# Altium PCB double_sece.PcbDoc
Units mm, origin at the board's own origin, x right, y up, seen from the top; angles counter-clockwise.
Board outline 50.38 x 50.25 mm, 2 copper layers (Top Layer, Bottom Layer); 16 components, 13 nets, 44 pads, 0 vias.
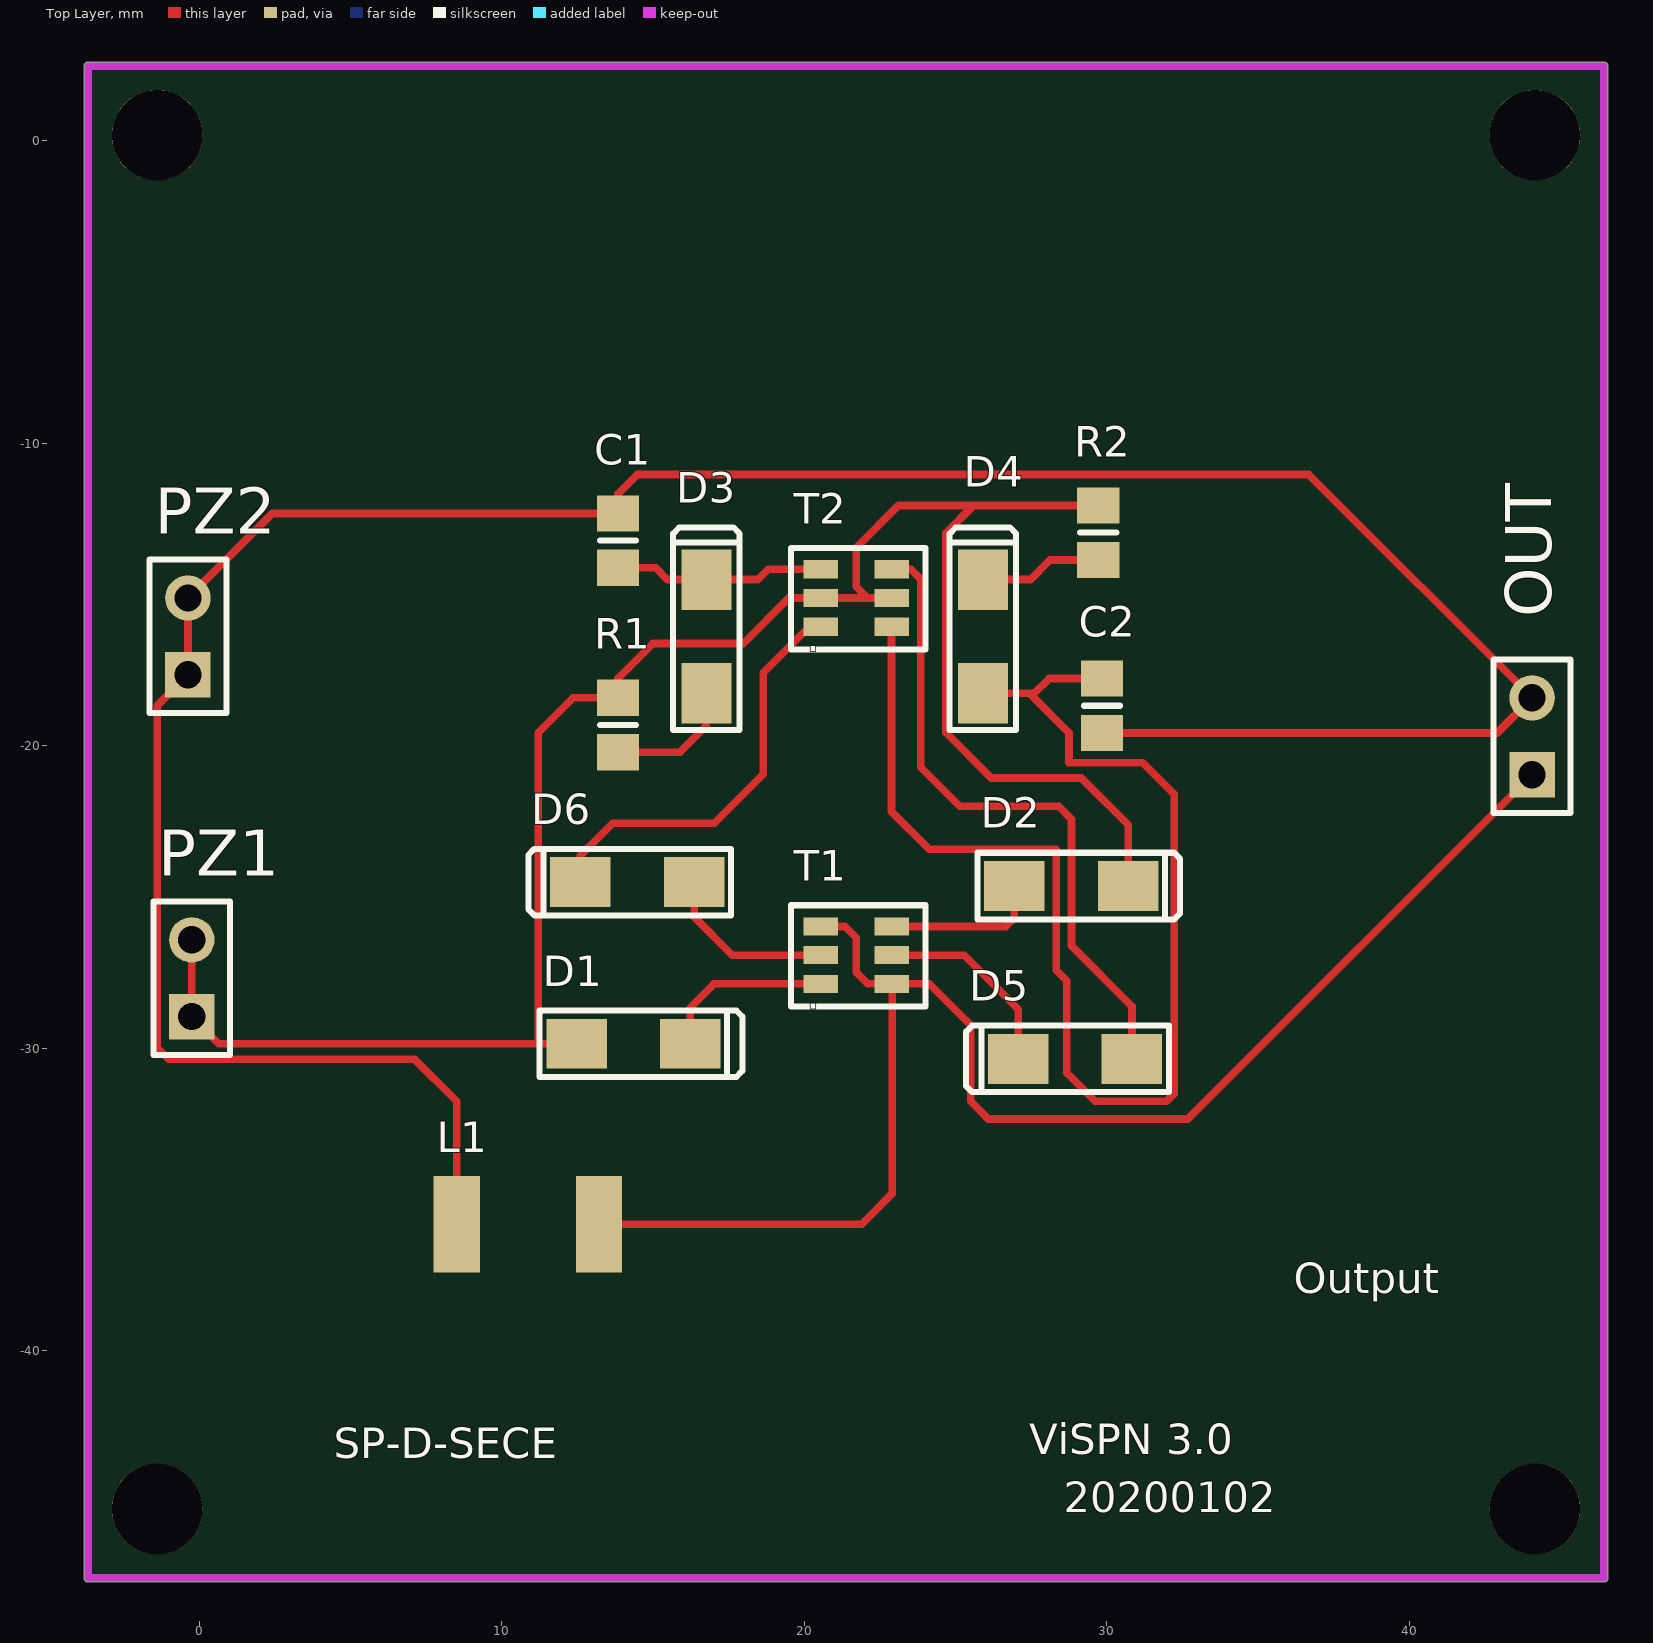
[diagram p0: Top Layer view]
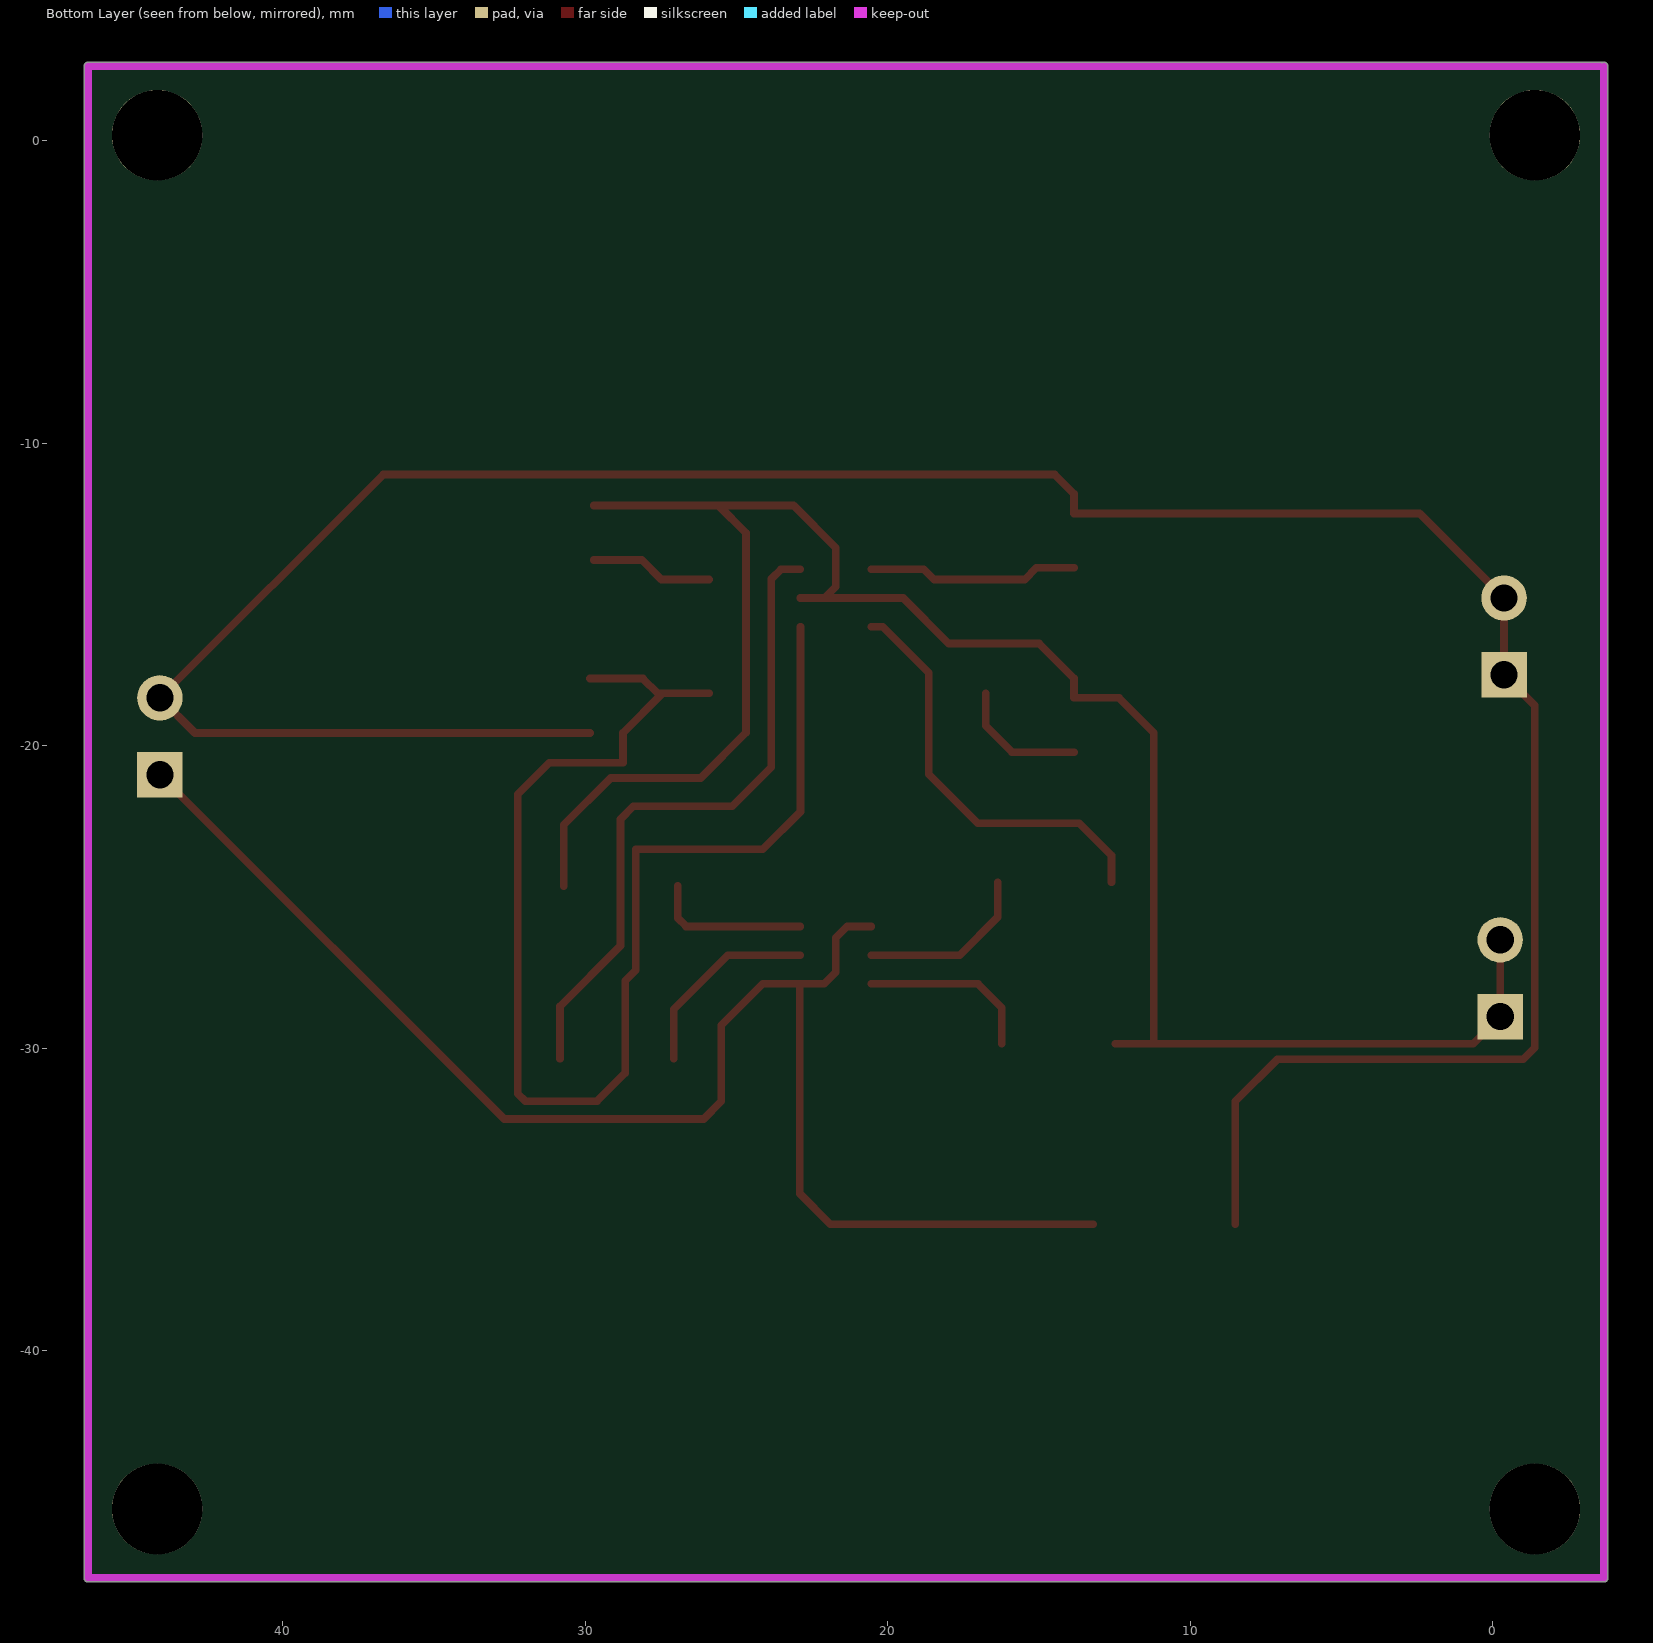
[diagram p1: Bottom Layer view, seen from below]

## Layer stack, top to bottom
Top Layer: signal copper 0.0356
Dielectric: dielectric 0.32, FR-4, Dk 4.8
Bottom Layer: signal copper 0.0356

## Board outline
-3.683,-47.65 cw(c-3.683,-47.523) -3.81,-47.523 -3.81,2.477 cw(c-3.683,2.477) -3.619,2.587 cw(c-3.556,2.477) -3.556,2.604 46.433,2.604 cw(c46.444,2.477) 46.571,2.477 46.571,-47.523 cw(c46.444,-47.523) 46.444,-47.65

## Design rules (kind name [scope] priority, off if disabled: settings)
Clearance [All] p1: gap=0.254
PolygonConnect [All] p1: connectstyle=Relief reliefconductorwidth=0.254 reliefentries=4 polygonreliefangle="90 Angle" airgapwidth=0.254
RoutingVias [All] p1: holewidth=0.711 width=1.27 viastyle="Through Hole" minholewidth=0.711 minwidth=1.27 maxholewidth=0.711 maxwidth=1.27
SolderMaskExpansion [All] p1: expansion=0.102
Width [All] p1: maxlimit=1.27 minlimit=0.254 preferedwidth=0.254
28 further rules are at their usual default settings.

## Components (designator, comment, footprint, x,y, rotation, side; value= is the part's Value field where it differs from the comment)
C1 "CAP" 6-0805_N 13.843,-13.216 r270 top
C2 "CAP" 6-0805_N 29.845,-18.677 r90 top
D1 "SS14" "SMD SS16" 14.351,-29.853 r0 top
D2 "SS14" "SMD SS16" 28.829,-24.638 r0 top
D3 "SS14" "SMD SS16" 16.764,-16.383 r90 top
D4 "SS14" "SMD SS16" 25.908,-16.383 r90 top
D5 "SS14" "SMD SS16" 28.956,-30.353 r180 top
D6 "SS16" "SMD SS16" 14.478,-24.511 r180 top
L1 "1mH" 1812 8.509,-35.822 r0 top
OUT "Header 2" HDR1X2 44.069,-20.955 r90 top
PZ1 "Header 2" HDR1X2 -0.254,-28.956 r90 top
PZ2 "Header 2" HDR1X2 -0.381,-17.653 r90 top
R1 "Res1" 6-0805_N 13.843,-19.312 r90 top
R2 "Res1" 6-0805_N 29.718,-12.954 r90 top
T1 "XN4601" XN4601 21.717,-26.924 r180 top
T2 "XN4601" XN4601 21.717,-15.113 r180 top

## Footprints (in the part's own frame and the unit in brackets; to place one, negate y for a bottom-side part, rotate by r counter-clockwise, add the part's x,y. Pads: shape width x height; smd on the part's side, far side on the other; paste and mask are expansions set on the pad)
6-0805_N [mm] "Chip Resistor, Body 2.0x1.2mm, IPC Medium Density"
  rect 1.2x1.4 smd: 1(-0.9,0) 2(0.9,0)
  silkscreen extent 0,-0.6 0,0.6, body extent -1.07,-0.7 1.07,0.7, height 0.7
1812 [mil]
  rect 60x125 smd: 1(0,0) 2(185,0)
HDR1X2 [mm] "Connector; Header; 2 Position"
  rect 1.5x1.5 hole 0.9: 1(0,0)
  round 1.5 hole 0.9: 2(2.54,0)
  silkscreen extent -1.27,-1.27 3.81,1.27
"SMD SS16" [mm]
  rect 2x1.65 smd: 1(-1.88,0) 2(1.88,0)
  silkscreen extent -3.1,-1.1 3.6,1.1
XN4601 [mm] "Composite N-type & P-type Transistors"
  rect 1.15x0.6 smd: 1(1.175,0.95) 2(1.175,0) 3(1.175,-0.95) 4(-1.175,-0.95) 5(-1.175,0) 6(-1.175,0.95)
  silkscreen extent -2.29,-1.65 2.16,1.7, body extent -0.87,-1.55 0.88,1.55, height 1.3

## Part data
C1 C2: "Capacitor"
D1 D2 D3 D4 D5 D6: library part "Diode 1N4004", "1 Amp General Purpose Rectifier"
L1: library part INDUCTOR
OUT PZ1 PZ2: "Header, 2-Pin"
R1 R2: "Resistor"
T1 T2: "Composite Transistors"

## Free pads (board coordinates)
  round 3 hole 3: 4(-1.397,0.191) 5(44.159,0.191) 6(-1.397,-45.237) 7(44.158,-45.237)

## Nets (pads, with @x,y where several pads share a name; then routed paths per layer and width w, separated by ;. In a path a pad name is that pad's centre, name@x,y a point inside that pad or via, vN(x,y) a via of type N, cw(c..) or ccw(c..) an arc to the next point about the centre after c; other vN are vias at no path point)
NetC1_2: C1.2 D3.2 T2.3 | length 7
  Top Layer w0.254: C1.2 15.088,-14.116 15.475,-14.503 D3.2 18.466,-14.503 18.806,-14.163 T2.3
NetC2_2: C2.2 D4.1 T2.6 | length 44.5
  Top Layer w0.254: T2.6 22.885,-16.063 22.885,-22.182 24.13,-23.427 28.33,-23.427 28.33,-27.424 28.677,-27.77 28.677,-30.818 29.616,-31.758 31.979,-31.758 32.233,-31.504 32.233,-21.598 31.193,-20.558 28.753,-20.558 28.753,-19.566 27.45,-18.263 ; D4.1 27.45,-18.263 ; C2.2 28.096,-17.777 27.61,-18.263 27.45,-18.263
NetD1_2: D1.2 T1.1 | length 5.8
  Top Layer w0.254: D1.2 16.231,-28.661 17.018,-27.874 T1.1
NetD2_1: D2.1 T1.4 | length 5.2
  Top Layer w0.254: T1.4 26.67,-25.974 26.949,-25.695 D2.1
NetD3_1: D3.1 R1.1 | length 4.4
  Top Layer w0.254: R1.1 15.889,-20.212 16.764,-19.337 D3.1
NetD4_2: D4.2 R2.1 | length 4.1
  Top Layer w0.254: D4.2 27.483,-14.503 28.132,-13.854 R2.1
NetD5_1: D5.1 T2.4 | length 21.8
  Top Layer w0.254: T2.4 23.528,-14.163 23.851,-14.486 23.851,-20.709 25.146,-22.004 28.416,-22.004 28.838,-22.427 28.838,-26.61 30.836,-28.608 D5.1
NetD5_2: D5.2 T1.5 | length 6.6
  Top Layer w0.254: T1.5 25.29,-26.924 27.076,-28.71 D5.2
NetD6_1: D6.1 T1.2 | length 5.9
  Top Layer w0.254: D6.1 16.358,-25.662 17.62,-26.924 T1.2
NetD6_2: D6.2 T2.1 | length 13.9
  Top Layer w0.254: D6.2 12.598,-23.63 13.665,-22.563 17.018,-22.563 18.644,-20.938 18.644,-17.585 20.165,-16.063 T2.1
PZ1: D1.1 D2.2 PZ1.1 PZ1.2 R1.2 R2.2 T2.2 T2.5 | length 67.4
  Top Layer w0.254: PZ1.2 PZ1.1 0.643,-29.853 11.201,-29.853 ; D1.1 11.201,-29.853 ; T2.5 22.09,-15.113 ; R2.2 25.597,-12.054 ; D2.2 30.709,-22.614 29.161,-21.066 26.189,-21.066 24.689,-19.566 24.689,-12.962 25.597,-12.054 ; 11.201,-29.853 11.201,-19.566 12.355,-18.412 R1.2 13.843,-17.763 14.986,-16.62 17.983,-16.62 19.49,-15.113 T2.2 22.09,-15.113 ; 22.09,-15.113 21.717,-14.74 21.717,-13.451 23.114,-12.054 25.597,-12.054
PZ2: C1.1 C2.1 L1.1 OUT.2 PZ2.1 PZ2.2 | length 94.3
  Top Layer w0.254: L1.1 8.509,-31.758 7.112,-30.361 -1.016,-30.361 -1.397,-29.98 -1.397,-18.669 PZ2.1 PZ2.2 2.416,-12.316 C1.1 13.843,-11.667 14.478,-11.032 36.686,-11.032 OUT.2 42.907,-19.577 C2.1
VOUT: L1.2 OUT.1 T1.3 T1.6 | length 50.1
  Top Layer w0.254: L1.2 21.895,-35.822 22.911,-34.806 T1.6@22.911,-27.874 ; T1.3 21.336,-25.974 21.717,-26.355 21.717,-27.493 22.098,-27.874 T1.6 T1.6@22.911,-27.874 ; OUT.1 32.682,-32.342 26.086,-32.342 25.502,-31.758 25.502,-29.246 24.13,-27.874 T1.6@22.911,-27.874

## Keep-outs
Keep-Out Layer:
  lines w0.254: -3.683,2.477 -3.683,-47.523 46.444,-47.523 46.444,2.477 ; -3.556,2.477 46.444,2.477

## Silkscreen, mask and mechanical layers (free items; w line width, h text height)
Top Overlay:
  text "Output" at 36.195,-38.1 h1.02
  text "ViSPN 3.0" at 27.432,-43.434 h1.02
  text "SP-D-SECE" at 4.445,-43.561 h1.02
  text "20200102" at 28.575,-45.339 h1